# Altium PCB UZ_D_IncrEncd_v2.PcbDoc (part 2 of 2)
Units mm, origin at the board's own origin, x right, y up, seen from the top; angles counter-clockwise.
Board outline 155.99 x 100.01 mm, 2 copper layers (Top Layer, Bottom Layer), stack 0.45 mm thick; 60 components, 97 nets, 455 pads, 49 vias.
Unrouted connection lines stored in the file: 26.
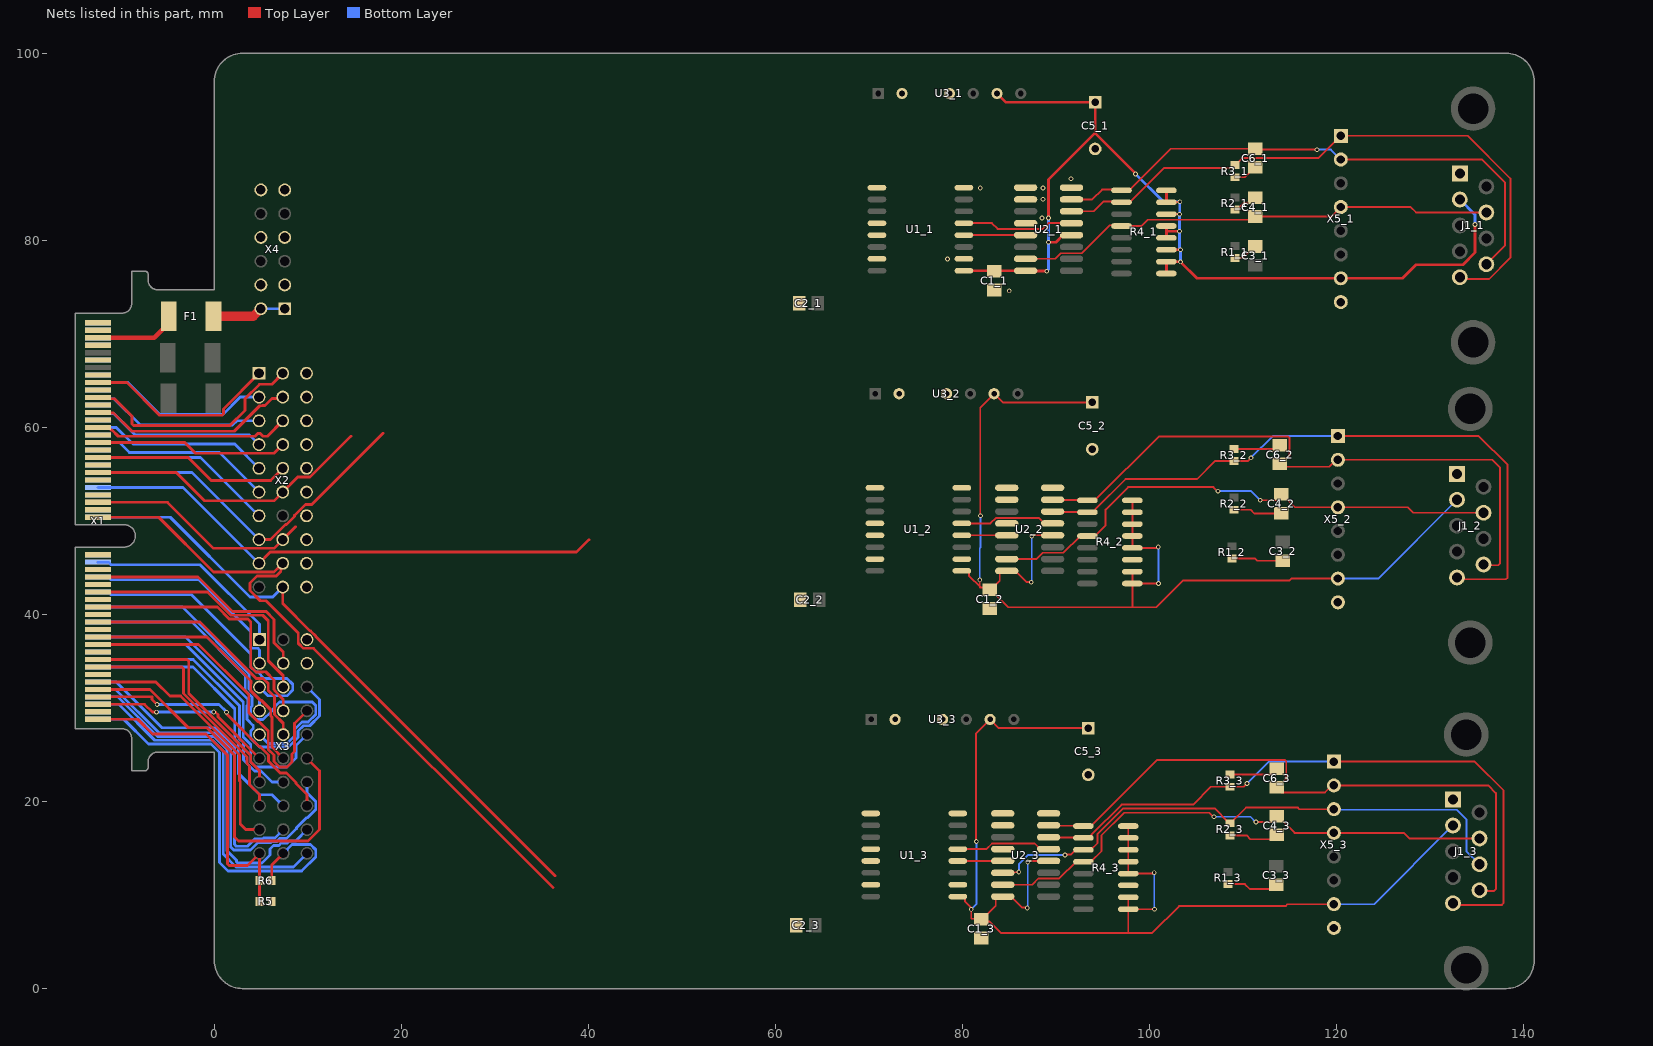
[diagram p2: the nets of this part, all layers, seen from the top]

## Via types
v1: diameter 0.5, hole 0.3, Top Layer to Bottom Layer, 49 vias

## Nets (pads, with @x,y where several pads share a name; then routed paths per layer and width w, separated by ;. In a path a pad name is that pad's centre, name@x,y a point inside that pad or via, vN(x,y) a via of type N, cw(c..) or ccw(c..) an arc to the next point about the centre after c; other vN are vias at no path point) (continued)
B+_3: J1_3.8 R2_3.1 R4_3.3 U2_3.14 X5_3.3 | length 60.8
  Top Layer w0.2: U2_3.14@84.302,12.37 84.364,12.432 85.992,12.432 v1(86.03,12.47) ; v1(90.952,14.275) 90.99,14.313 91.586,14.313 92.107,14.834 R4_3.3@92.926,14.834 93.726,14.834 94.453,15.56 94.453,16.544 97.168,19.26 106.948,19.26 108.402,17.806 108.452,17.806 R2_3.1@108.585,17.673 108.635,17.673 110.312,19.349 115.86,19.349 116.032,19.177 X5_3.3@119.71,19.177
  Bottom Layer w0.2: v1(86.03,12.47) 86.03,13.306 86.999,14.275 v1(90.952,14.275) ; X5_3.3@119.71,19.177 119.776,19.111 132.865,19.111 133.883,18.093 133.883,14.681 J1_3.8@135.283,13.281
B-_1: C4_1.2 J1_1.7 R4_1.4 U2_1.15 X5_1.4 | length 51.9
  Top Layer w0.2: U2_1.15@86.765,78.029 89.916,78.029 90.516,78.629 92.743,78.629 95.731,81.616 R4_1.4@97.039,81.616 ; R4_1.4@97,81.535 99.135,81.535 99.8,82.2 110.95,82.2 111.3,82.55 119.431,82.55 X5_1.4@120.447,83.566 127.915,83.566 128.501,82.98 J1_1.7@136.02,82.98
B-_2: C4_2.2 J1_2.7 R4_2.4 U2_2.15 X5_2.4 | length 56.3
  Top Layer w0.2: U2_2.15@84.734,45.923 87.885,45.923 88.555,46.593 90.782,46.593 92.576,48.387 R4_2.4@93.358,48.387 94.158,48.387 95.295,49.524 95.295,51.212 97.702,53.619 106.829,53.619 107.261,53.188 v1(107.315,53.188) ; v1(111.845,52.215) 113.445,52.215 113.623,52.393 C4_2.2@113.723,52.393 ; C4_2.2@114.071,52.841 114.171,52.841 115.552,51.46 127.61,51.46 128.196,50.874 J1_2.7@135.715,50.874
  Bottom Layer w0.2: v1(107.315,53.188) 110.873,53.188 v1(111.845,52.215)
B-_3: C4_3.2 J1_3.7 R4_3.4 U2_3.15 X5_3.4 | length 56.5
  Top Layer w0.2: U2_3.15@84.302,11.1 87.454,11.1 88.124,11.77 90.351,11.77 92.144,13.564 R4_3.4@92.926,13.564 93.726,13.564 94.863,14.701 94.863,16.389 97.27,18.796 106.397,18.796 106.829,18.364 v1(106.883,18.364) ; v1(111.388,17.798) 112.988,17.798 113.166,17.976 C4_3.2@113.266,17.976 ; C4_3.2@113.216,17.976 114.163,17.976 115.501,16.637 127.178,16.637 127.764,16.051 J1_3.7@135.283,16.051
  Bottom Layer w0.2: v1(106.883,18.364) 110.795,18.364 111.361,17.798 v1(111.388,17.798)
B_encoder_1: U1_1.13 X1.42 X2.22 | length 38.2
  Top Layer w0.3: X2.22@4.775,48.006 5.993,48.006 7.598,49.611 7.702,49.611 8.585,50.494 8.585,50.598 9.738,51.751 10.408,51.751 18.034,59.377
  Bottom Layer w0.3: X1.42@-12.44,55.191 -2.41,55.191 X2.22@4.775,48.006
B_encoder_2: U1_2.13 X1.49 X2.23 | length 24.1
  Top Layer w0.3: X1.49@-12.44,51.991 -5.01,51.991 -0.09,47.071 6.38,47.071 X2.23@7.315,48.006 8.687,49.378
B_encoder_3: U1_3.13 X1.54 X2.29 | length 66.7
  Top Layer w0.3: X2.29@7.315,42.926 7.315,41.173 10.241,38.248 10.293,38.248 10.841,37.7 10.841,37.648 36.424,12.065
  Bottom Layer w0.3: X1.54@-12.44,50.391 -4.722,50.391 3.81,41.859 6.248,41.859 X2.29@7.315,42.926
B_single_1: U1_1.4 U2_1.13 | length 6.5
  Top Layer w0.2: U1_1.4@80.239,80.569 U2_1.13@86.765,80.569
B_single_2: U1_2.4 U2_2.13 | length 4.8
  Top Layer w0.2: U1_2.4@79.934,48.463 U2_2.13@84.734,48.463
B_single_3: U1_3.4 U2_3.13 | length 4.8
  Top Layer w0.2: U1_3.4@79.502,13.64 U2_3.13@84.302,13.64
Collective_FLT: X1.96 | length 36.6
  Bottom Layer w0.3: X1.96@-12.44,30.391 -10.208,30.391 -6.373,26.556 -0.211,26.556 0.946,25.398 0.946,14.386 2.324,13.009 8.462,13.009 9.906,14.453
CPLD_DigIn_01: X1.83 | length 25.8
  Top Layer w0.3: X1.83@-12.44,35.191 -2.919,35.191 -2.743,35.015 -2.743,31.54 3.891,24.906 3.891,24.225 4.826,23.29 4.826,22.073
CPLD_DigIn_02: X1.85 | length 27.3
  Top Layer w0.3: X1.85@-12.44,34.391 -3.478,34.391 -3.302,34.215 -3.302,31.533 3.491,24.74 3.491,24.06 3.772,23.779 3.772,21.784 4.826,20.73 4.826,19.533
CPLD_DigOut_01: X1.84 | length 28.4
  Bottom Layer w0.3: X1.84@-12.44,35.191 -2.265,35.191 2.691,30.235 2.691,26.716 3.108,26.299 3.108,24.443 4.302,23.248 4.973,23.248 6.148,22.073 7.366,22.073
CPLD_DigOut_02: X1.86 | length 29.8
  Bottom Layer w0.3: X1.86@-12.44,34.391 -2.285,34.391 2.184,29.921 2.184,26.657 2.559,26.282 2.559,23.017 4.865,20.711 6.187,20.711 7.366,19.533
DIG_IO_00: X1.17 X2.01 | length 20.8
  Top Layer w0.3: X1.17@-12.44,64.791 -9.34,64.791 -5.848,61.299 0.819,61.299 0.965,61.445 0.965,61.976 X2.01@4.775,65.786
DIG_IO_01: X1.18 X2.04 | length 19.4
  Bottom Layer w0.3: X1.18@-12.44,64.791 -9.237,64.791 -5.845,61.399 0.919,61.399 2.766,63.246 X2.04@4.775,63.246
DIG_IO_02: X1.21 X2.02 | length 24.5
  Top Layer w0.3: X1.21@-12.44,63.191 -12.315,63.066 -10.691,63.066 -8.814,61.189 -8.814,60.374 -8.638,60.198 1.651,60.198 3.277,61.824 3.277,63.07 4.814,64.607 6.136,64.607 X2.02@7.315,65.786
DIG_IO_03: X1.22 X2.07 | length 18.6
  Bottom Layer w0.3: X1.22@-12.44,63.191 -12.315,63.066 -10.717,63.066 -7.899,60.249 1.93,60.249 2.388,60.706 X2.07@4.775,60.706
DIG_IO_04: X1.25 X2.05 | length 22.1
  Top Layer w0.3: X1.25@-12.44,61.591 -12.396,61.547 -10.773,61.547 -8.814,59.588 2.134,59.588 4.856,62.311 5.162,62.311 5.183,62.332 5.41,62.332 6.18,63.102 7.171,63.102 X2.05@7.315,63.246
DIG_IO_05: X1.26 X2.10 | length 18.6
  Bottom Layer w0.3: X1.26@-12.44,61.591 -12.315,61.466 -10.742,61.466 -8.458,59.182 3.759,59.182 X2.10@4.775,58.166
DIG_IO_06: X1.29 X2.08 | length 21.1
  Top Layer w0.3: X1.29@-12.44,59.991 -11.315,59.991 -11.04,59.716 -10.936,59.716 -10.275,59.055 4.342,59.055 4.647,59.36 4.904,59.36 5.208,59.055 5.664,59.055 X2.08@7.315,60.706
DIG_IO_07: X1.30 X2.13 | length 19
  Bottom Layer w0.3: X1.30@-12.44,59.991 -10.486,59.991 -8.712,58.217 2.184,58.217 X2.13@4.775,55.626
DIG_IO_08: X1.33 X2.11 | length 20.6
  Top Layer w0.3: X1.33@-12.44,58.391 -3.163,58.391 -2.003,57.231 6.38,57.231 X2.11@7.315,58.166
DIG_IO_09: X1.34 X2.16 | length 19.4
  Bottom Layer w0.3: X1.34@-12.44,58.391 -10.156,58.391 -9.093,57.328 0.533,57.328 X2.16@4.775,53.086
DIG_IO_10: X1.37 X2.14 | length 21.3
  Top Layer w0.3: X1.37@-12.44,56.791 -2.791,56.791 -0.33,54.331 6.02,54.331 X2.14@7.315,55.626
DIG_IO_11: X1.38 X2.19 | length 19.8
  Bottom Layer w0.3: X1.38@-12.44,56.791 -1.47,56.791 X2.19@4.775,50.546
DIG_IO_12: U1_1.12 X1.41 X2.17 | length 31.2
  Top Layer w0.3: X1.41@-12.44,55.191 -4.07,55.191 -1.03,52.151 6.38,52.151 X2.17@7.315,53.086 8.92,54.691 10.242,54.691 14.614,59.063
DIG_IO_15: U1_2.12 X1.46 X2.25 | length 56.9
  Top Layer w0.3: X2.25@4.775,45.466 5.98,46.671 38.736,46.671 40.062,47.997
  Bottom Layer w0.3: X1.46@-12.44,53.591 -3.35,53.591 X2.25@4.775,45.466
DIG_IO_18: U1_3.12 X1.53 X2.26 | length 74
  Top Layer w0.3: X1.53@-12.44,50.391 -5.944,50.391 -0.084,44.531 6.38,44.531 X2.26@7.11,45.261 ; X2.26@7.315,45.466 X2.26@7.11,45.261 ; 36.195,10.795 10.612,36.378 9.519,36.378 8.971,36.925 8.971,38.019 5.518,41.472 4.907,41.472 3.81,42.569 3.81,43.358 4.572,44.12 6.621,44.12 7.106,44.604 7.106,44.755 7.11,44.76 X2.26@7.11,45.261
DIG_IO_21: X1.58 X3.01 | length 21.7
  Bottom Layer w0.3: X1.58@-12.44,45.591 -11.315,45.591 -11.04,45.316 -1.526,45.316 4.826,38.964 X3.01@4.826,37.313
DIG_IO_22: X1.61 X3.05 | length 25.8
  Top Layer w0.3: X1.61@-12.44,43.991 -1.751,43.991 1.93,40.31 5.549,40.31 6.388,39.471 6.388,36.968 7.366,35.99 X3.05@7.366,34.773
DIG_IO_23: X1.62 X3.04 | length 22.9
  Bottom Layer w0.3: X1.62@-12.44,43.991 -11.315,43.991 -11.04,43.716 -1.628,43.716 3.891,38.197 3.891,36.524 4.037,36.378 4.65,36.378 4.826,36.202 X3.04@4.826,34.773
DIG_IO_24: X1.65 X3.08 | length 27.2
  Top Layer w0.3: X1.65@-12.44,42.391 -0.716,42.391 1.765,39.91 5.175,39.91 5.761,39.324 5.761,35.055 7.366,33.45 X3.08@7.366,32.233
DIG_IO_25: X1.66 X3.07 | length 30.5
  Bottom Layer w0.3: X1.66@-12.44,42.391 -11.315,42.391 -11.04,42.116 -2.467,42.116 3.891,35.758 3.891,34.385 4.439,33.838 4.65,33.838 5.32,33.168 7.753,33.168 8.382,32.539 8.382,31.926 7.753,31.298 5.761,31.298 X3.07@4.826,32.233
DIG_IO_26: X1.69 X3.11 | length 28.6
  Top Layer w0.3: X1.69@-12.44,40.791 0.318,40.791 1.599,39.51 3.594,39.51 3.891,39.213 3.891,34.385 4.439,33.838 5.213,33.838 5.249,33.873 5.497,33.873 6.375,32.995 6.375,31.979 6.477,31.877 6.477,31.799 7.366,30.91 X3.11@7.366,29.693
DIG_IO_27: X1.70 X3.10 | length 23.5
  Bottom Layer w0.3: X1.70@-12.44,40.791 -3.421,40.791 3.706,33.664 3.706,32.03 4.826,30.91 X3.10@4.826,29.693
DIG_IO_28: X1.73 X3.14 | length 27.1
  Top Layer w0.3: X1.73@-12.44,39.191 -1.548,39.191 4.475,33.168 5.213,33.168 5.761,32.62 5.761,31.882 6.431,31.212 6.431,29.305 7.366,28.37 X3.14@7.366,27.153
DIG_IO_29: X1.74 X3.13 | length 39.8
  Bottom Layer w0.3: X1.74@-12.44,39.191 -2.386,39.191 3.306,33.499 3.306,31.865 4.013,31.157 4.013,30.202 3.891,30.08 3.891,29.305 4.439,28.758 5.213,28.758 6.096,29.64 6.096,29.745 6.984,30.632 10.465,30.632 10.841,30.256 10.841,29.305 10.032,28.497 9.362,28.497 8.553,27.688 8.553,27.017 7.753,26.218 5.761,26.218 X3.13@4.826,27.153
DIG_Res_00: X1.78 | length 36.5
  Bottom Layer w0.3: X1.78@-12.44,37.591 -3.086,37.591 3.585,30.92 3.585,30.34 3.491,30.246 3.491,28.798 4.15,28.14 4.15,27.798 3.891,27.54 3.891,26.765 4.839,25.818 7.919,25.818 8.953,26.852 8.953,27.522 9.528,28.097 10.198,28.097 11.241,29.14 11.241,30.898 9.906,32.233
DIG_Res_01: X1.79 | length 35.2
  Top Layer w0.3: X1.79@-12.44,36.791 -1.693,36.791 3.677,31.421 3.677,29.52 4.667,28.53 4.771,28.53 5.761,27.54 5.761,25.566 6.37,24.957 6.37,24.286 6.979,23.678 7.753,23.678 8.301,24.225 8.301,25.071 8.571,25.341 8.571,28.358 9.906,29.693
DIG_Res_02: X1.80 | length 33.3
  Bottom Layer w0.3: X1.80@-12.44,36.791 -3.052,36.791 3.091,30.648 3.091,26.881 3.891,26.081 3.891,24.225 4.439,23.678 7.753,23.678 8.727,24.652 8.727,25.974 9.906,27.153
DIG_Res_03: X1.91 | length 44.2
  Top Layer w0.3: X1.91@-12.44,31.991 -6.889,31.991 -2.787,27.889 -0.79,27.889 2.159,24.941 2.159,16.21 2.581,15.788 10.023,15.788 11.241,17.005 11.241,23.278 9.906,24.613
DIG_Res_04: X1.92 | length 41.8
  Bottom Layer w0.3: X1.92@-12.44,31.991 -10.556,31.991 -5.921,27.356 0.12,27.356 1.759,25.717 1.759,15.13 2.074,14.815 3.866,14.815 4.652,15.601 6.061,15.601 6.163,15.704 6.643,15.704 6.966,16.027 7.723,16.027 8.788,17.093 8.788,17.197 9.854,18.263 9.958,18.263 10.841,19.145 10.841,19.997 9.906,20.932 9.906,22.073
DIG_Res_05: X1.93 | length 28.6
  Top Layer w0.3: X1.93@-12.44,31.191 -6.655,31.191 -6.655,30.912 v1(-6.121,30.378) ; v1(1.295,29.54) 1.334,29.502 1.334,29.323 4.79,25.866 4.895,25.866 5.794,24.967 5.794,24.297 7.044,23.047 7.714,23.047 8.727,22.034 8.727,21.929 9.906,20.75 9.906,19.533
  Bottom Layer w0.3: v1(-6.121,30.378) 0.508,30.378 1.295,29.591 v1(1.295,29.54)
DIG_Res_06: X1.94 | length 38
  Bottom Layer w0.3: X1.94@-12.44,31.191 -10.321,31.191 -6.086,26.956 -0.046,26.956 1.346,25.564 1.346,14.732 2.362,13.716 2.362,13.536 2.489,13.409 5.105,13.409 5.959,14.263 5.959,14.933 6.329,15.304 6.895,15.304 7.137,15.546 7.807,15.546 8.049,15.788 8.701,15.788 9.906,16.993
DIG_Res_07: X1.95 | length 19.8
  Top Layer w0.3: X1.95@-12.44,30.391 -7.455,30.391 -6.619,29.555 v1(-6.192,29.555) ; v1(-0.064,29.574) -0.026,29.535 0.136,29.535 0.373,29.298 0.373,29.065 4.826,24.613
  Bottom Layer w0.3: v1(-6.192,29.555) -6.174,29.574 v1(-0.064,29.574)
DIG_Res_08: X1.77 | length 28.1
  Top Layer w0.3: X1.77@-12.44,37.591 -0.786,37.591 3.914,32.891 3.914,32.642 3.891,32.62 3.891,31.845 4.909,30.828 5.013,30.828 6.031,29.81 6.031,29.14 6.161,29.01 6.161,25.818 7.366,24.613
GND: C2_1.1 C2_2.1 C2_3.1 R5.1 U1_1.9 U1_1.15 U1_2.9 U1_2.15 U1_3.9 U1_3.15 U3_1.2 U3_2.2 U3_3.2 X1.1 X1.2 X1.3 X1.4 X1.7 X1.8 X1.11 X1.12 X1.15 X1.16 X1.19 X1.20 X1.23 X1.24 X1.27 X1.28 X1.31 X1.32 X1.35 X1.36 X1.39 X1.40 X1.43 X1.44 X1.47 X1.48 X1.51 X1.52 X1.55 X1.56 X1.59 X1.60 X1.63 X1.64 X1.67 X1.68 X1.71 X1.72 X1.75 X1.76 X1.81 X1.82 X1.87 X1.88 X1.97 X1.98 X2.03 X2.06 X2.09 X2.12 X2.15 X2.18 X2.21 X2.24 X2.27 X2.30 X3.03 X3.06 X4.03 X4.04 X4.07 X4.08 X4.11 X4.12
GND_ENC_1: C1_1.1 C5_1.2 J1_1.1 U1_1.2 U1_1.8 U2_1.8 U2_1.9 U2_1.10 U2_1.12 U3_1.4 X5_1.8
  other v1: 85,74.6 78.4,78 88.5,82.4 88.6,84.4 81.9,85.6 88.6,85.6 91.6,86.6
GND_ENC_2: C1_2.1 C5_2.2 J1_2.1 U1_2.2 U1_2.8 U2_2.8 U2_2.9 U2_2.10 U2_2.12 U3_2.4 X5_2.8
GND_ENC_3: C1_3.1 C5_3.2 J1_3.1 U1_3.2 U1_3.8 U2_3.8 U2_3.9 U2_3.10 U2_3.12 U3_3.4 X5_3.8
I2C0_SCA: X1.90 | length 34
  Bottom Layer w0.3: X1.90@-12.44,32.791 -10.49,32.791 -5.588,27.889 0.152,27.889 2.159,25.883 2.159,15.392 2.337,15.215 3.531,15.215 4.317,16.001 5.157,16.001 5.259,16.104 6.477,16.104 7.366,16.993
I2C0_SCL: X1.89 | length 28.1
  Top Layer w0.3: X1.89@-12.44,32.791 -6.273,32.791 -4.75,31.267 -3.602,31.267 2.691,24.974 2.691,22.201 2.762,22.13 2.762,17.583 3.353,16.993 4.826,16.993
NetC3_1_1: C3_1.1 R1_1.2 | length 2.7
  Top Layer w0.2: R1_1.2@109.118,78.099 109.98,78.099 111.228,79.348 C3_1.1@111.328,79.348
NetC3_2_1: C3_2.1 R1_2.2 | length 5.6
  Top Layer w0.2: R1_2.2@108.814,45.994 111.262,45.994 111.514,45.742 C3_2.1@114.262,45.742
NetC3_3_1: C3_3.1 R1_3.2 | length 4.9
  Top Layer w0.2: R1_3.2@108.382,11.171 110.193,11.171 110.72,10.643 C3_3.1@113.106,10.643
NetC4_1_1: C4_1.1 R2_1.2 | length 2.2
  Top Layer w0.2: R2_1.2@109.322,83.301 109.372,83.301 110.095,84.025 110.482,84.025 C4_1.1@111.007,84.55
NetC4_2_1: C4_2.1 R2_2.2 | length 5.3
  Top Layer w0.2: R2_2.2@109.017,51.196 110.808,51.196 111.223,50.781 114.011,50.781 C4_2.1@114.071,50.841
NetC4_3_1: C4_3.1 R2_3.2 | length 5.4
  Top Layer w0.2: R2_3.2@108.585,16.373 110.376,16.373 110.791,15.958 113.148,15.958 C4_3.1@113.614,16.424
NetC6_1_1: C6_1.1 R3_1.2 | length 2.6
  Top Layer w0.2: R3_1.2@109.118,86.75 110.178,86.75 111.228,87.8 C6_1.1@111.328,87.8
NetC6_2_1: C6_2.1 R3_2.2 | length 5.1
  Top Layer w0.2: R3_2.2@109.017,57.698 113.544,57.698 C6_2.1@113.944,58.099
NetC6_3_1: C6_3.1 R3_3.2 | length 5.3
  Top Layer w0.2: R3_3.2@108.585,22.875 112.86,22.875 113.489,23.504 C6_3.1@113.589,23.504
PILOT_IN: R6.2 X1.100 | length 45.8
  Top Layer w0.3: R6.2@6.136,11.532 6.136,13.223 7.366,14.453
  Bottom Layer w0.3: X1.100@-12.44,28.791 -9.691,28.791 -7.036,26.137 -0.358,26.137 0.546,25.233 0.546,13.47 1.456,12.56 9.336,12.56 10.841,14.065 10.841,14.84 10.293,15.388 8.301,15.388 7.366,14.453
PILOT_OUT: R5.2 R6.1 X1.99 | length 36.2
  Top Layer w0.3: X1.99@-12.44,28.791 -8.192,28.791 -6.629,27.229 -0.884,27.229 1.397,24.948 1.397,13.333 1.573,13.157 3.531,13.157 4.826,14.453 4.831,14.447 4.831,11.537 R6.1@4.836,11.532 R5.2@4.836,9.322
VCC_ENC_1: C1_1.2 C5_1.1 J1_1.2 R4_1.9 R4_1.10 R4_1.11 R4_1.12 R4_1.13 R4_1.14 R4_1.15 R4_1.16 U1_1.1 U2_1.4 U2_1.16 U3_1.6 X5_1.7 | length 112.2
  Top Layer w0.2: R4_1.14@101.803,82.802 103.198,82.802 v1(103.2,82.8) ; R4_1.15@101.825,84.1 103.219,84.1 v1(103.245,84.126) ; v1@103.297,78.997 v1(103.3,79)
  Top Layer w0.3: U1_1.1@80.15,76.755 U2_1.16@86.75,76.755 86.786,76.719 88.981,76.719 v1(89,76.7) ; U3_1.6@83.685,95.708 84.615,94.778 C5_1.1@94.183,94.778 94.183,91.483 ; v1(89.2,79.8) 89.985,79.8 90.75,80.565 U2_1.4@91.65,80.565 ; v1(89.2,82.4) 89.2,86.5 94.183,91.483 ; v1(98.5,87.1) 98.5,87.166 94.183,91.483 ; R4_1.9@101.8,76.455 R4_1.10@101.8,77.725 101.813,77.712 103.288,77.712 v1(103.3,77.7) 105.054,75.946 X5_1.7@120.447,75.946 127.046,75.946 128.5,77.4 133.5,77.4 134.798,78.698 v1(134.798,81.703) ; R4_1.11@101.8,78.995 101.803,78.997 v1@103.297,78.997 ; R4_1.12@101.8,80.265 101.8,80.9 ; R4_1.13@101.8,81.535 101.8,80.9 ; R4_1.14@101.8,82.805 R4_1.14@101.803,82.802 ; R4_1.16@101.8,85.345 R4_1.15@101.8,84.075 R4_1.15@101.825,84.1 ; v1(103.2,80.977) 101.877,80.977 101.8,80.9
  Bottom Layer w0.3: v1(89,76.7) 89.2,76.9 v1(89.2,79.8) v1(89.2,82.4) ; v1(98.5,87.1) 101.474,84.126 v1(103.245,84.126) 103.222,84.103 103.222,82.822 v1(103.2,82.8) v1(103.2,80.977) 103.2,79.154 103.3,79.054 v1(103.3,79) v1(103.3,77.7) ; J1_1.2@133.18,84.365 134.798,82.747 v1(134.798,81.703)
VCC_ENC_2: C1_2.2 C5_2.1 J1_2.2 R4_2.9 R4_2.10 R4_2.11 R4_2.12 R4_2.13 R4_2.14 R4_2.15 R4_2.16 U1_2.1 U2_2.4 U2_2.16 U3_2.6 X5_2.7 | length 123.7
  Top Layer w0.2: U1_2.1@79.934,44.653 80.553,44.653 80.691,44.515 80.691,44.135 81.94,42.886 82.65,42.886 C1_2.2@82.906,42.631 C1_2.2@83.006,42.631 ; 81.848,42.886 v1(81.848,43.697) ; v1(81.915,50.546) 81.89,50.571 81.89,62.111 U3_2.6@83.38,63.602 84.31,62.673 C5_2.1@93.878,62.673 ; v1(87.351,43.434) 87.312,43.472 86.815,43.472 85.634,44.653 U2_2.16@84.734,44.653 84.169,44.653 83.984,44.468 83.984,43.609 C1_2.2@83.006,42.631 ; v1(87.401,48.362) 87.503,48.463 U2_2.4@89.634,48.463 ; R4_2.10@98.158,44.577 R4_2.9@98.158,43.307 ; R4_2.16@98.158,52.197 R4_2.15@98.158,50.927 R4_2.14@98.158,49.657 R4_2.13@98.158,48.387 R4_2.12@98.158,47.117 100.787,47.117 100.889,47.219 v1(100.94,47.219) ; v1(100.965,43.307) R4_2.9@98.158,43.307 ; X5_2.7@120.142,43.84 115.173,43.84 114.976,43.644 103.588,43.644 100.711,40.767 98.196,40.767 ; C1_2.2@83.006,42.631 84.869,40.767 98.196,40.767 ; R4_2.9@98.158,43.307 98.158,40.805 98.196,40.767
  Bottom Layer w0.2: v1(81.848,43.697) 81.848,47.069 81.915,47.136 v1(81.915,50.546) ; v1(87.351,43.434) 87.351,43.51 87.401,43.561 v1(87.401,48.362) ; v1(100.94,47.219) 100.94,43.332 v1(100.965,43.307) ; X5_2.7@120.142,43.84 124.456,43.84 J1_2.2@132.875,52.259
VCC_ENC_3: C1_3.2 C5_3.1 J1_3.2 R4_3.9 R4_3.10 R4_3.11 R4_3.12 R4_3.13 R4_3.14 R4_3.15 R4_3.16 U1_3.1 U2_3.4 U2_3.16 U3_3.6 X5_3.7 | length 126
  Top Layer w0.2: U1_3.1@79.502,9.83 80.121,9.83 80.259,9.691 80.259,9.312 v1@81.019,8.553 ; v1(80.933,8.467) 80.933,8.08 80.933,7.462 81.542,7.462 C1_3.2@81.823,7.181 ; v1(81.483,15.723) 81.458,15.748 81.458,27.288 U3_3.6@82.949,28.779 83.878,27.849 C5_3.1@93.447,27.849 ; v1(86.919,8.611) 86.881,8.649 86.383,8.649 U2_3.16@85.202,9.83 ; v1(86.97,13.538) 87.071,13.64 U2_3.4@89.202,13.64 ; R4_3.10@97.726,9.754 R4_3.9@97.726,8.484 ; R4_3.16@97.726,17.374 R4_3.15@97.726,16.104 R4_3.14@97.726,14.834 R4_3.13@97.726,13.564 R4_3.12@97.726,12.294 100.355,12.294 100.457,12.395 v1(100.508,12.395) ; v1(100.533,8.484) R4_3.9@97.726,8.484 ; X5_3.7@119.71,9.017 114.741,9.017 114.544,8.82 103.156,8.82 100.279,5.944 97.765,5.944 ; C1_3.2@81.823,7.181 82.87,7.181 84.107,5.944 97.765,5.944 ; C1_3.2@81.823,7.181 81.823,7.233 C1_3.2@81.991,7.401 82.091,7.401 83.552,8.862 83.552,9.645 83.737,9.83 U2_3.16@84.302,9.83 ; U2_3.16@84.302,9.83 U2_3.16@85.202,9.83 ; U2_3.16@84.302,9.83 U2_3.16@85.202,9.83 ; R4_3.9@97.726,8.484 97.726,5.982 97.765,5.944
  Bottom Layer w0.2: v1(80.933,8.467) 81.483,9.017 v1(81.483,15.723) ; v1(86.919,8.611) 86.919,8.687 86.97,8.738 v1(86.97,13.538) ; v1(100.508,12.395) 100.508,8.509 v1(100.533,8.484) ; X5_3.7@119.71,9.017 124.024,9.017 J1_3.2@132.443,17.436
VIN: F1.1 X1.5 X1.6 | length 8.9
  Top Layer w0.5: X1.5@-12.44,69.591 -6.44,69.591 -4.879,71.152 F1.1@-4.879,71.882
VIN_fused: F1.2 X4.01 X4.02 | length 8
  Top Layer w1: F1.2@-0.099,71.882 4.166,71.882 X4.02@4.978,72.695
  Bottom Layer w0.3: X4.02@4.978,72.695 X4.01@7.518,72.695
Z+_1: J1_1.5 R3_1.1 R4_1.2 U2_1.6 X5_1.1 | length 67.1
  Top Layer w0.2: U2_1.6@91.665,83.109 94.009,83.109 95.052,84.152 R4_1.2@97.034,84.152 ; R4_1.2@97,84.075 97.875,84.075 101.525,87.725 108.793,87.725 R3_1.1@109.118,88.05 109.168,88.05 109.918,88.8 118.061,88.8 X5_1.1@120.447,91.186 134.014,91.186 138.582,86.618 138.582,78.153 136.299,75.87 133.365,75.87 J1_1.5@133.18,76.055
Z+_2: J1_2.5 R3_2.1 R4_2.2 U2_2.6 X5_2.1 | length 71.1
  Top Layer w0.2: U2_2.6@89.634,51.003 89.672,50.965 93.32,50.965 R4_2.2@93.358,50.927 94.077,50.927 94.215,51.066 94.215,51.264 97.434,54.483 105.08,54.483 106.995,56.398 R3_2.1@109.017,56.398 110.5,56.398 v1(110.846,56.744) ; X5_2.1@120.142,59.08 135.204,59.08 138.278,56.007 138.278,43.94 138.102,43.764 133.06,43.764 J1_2.5@132.875,43.949
  Bottom Layer w0.2: v1(110.846,56.744) 113.182,59.08 X5_2.1@120.142,59.08
Z+_3: J1_3.5 R3_3.1 R4_3.2 U2_3.6 X5_3.1 | length 71.1
  Top Layer w0.2: U2_3.6@89.202,16.18 89.24,16.142 92.888,16.142 R4_3.2@92.926,16.104 93.645,16.104 93.784,16.242 93.784,16.441 97.003,19.66 104.648,19.66 106.563,21.575 R3_3.1@108.585,21.575 110.069,21.575 v1(110.414,21.92) ; X5_3.1@119.71,24.257 134.772,24.257 137.846,21.184 137.846,9.117 137.67,8.941 132.629,8.941 J1_3.5@132.443,9.126
  Bottom Layer w0.2: v1(110.414,21.92) 112.751,24.257 X5_3.1@119.71,24.257
Z-_1: C6_1.2 J1_1.9 R4_1.1 U2_1.7 X5_1.2 | length 59.7
  Top Layer w0.2: U2_1.7@91.665,84.379 93.879,84.379 94.926,85.426 97.881,85.426 102.255,89.8 C6_1.2@111.328,89.8 111.428,89.7 v1(117.9,89.7) ; X5_1.2@120.447,88.646 135.554,88.646 138,86.2 138,79.42 J1_1.9@136.02,77.44
  Bottom Layer w0.2: v1(117.9,89.7) 119.393,89.7 X5_1.2@120.447,88.646
Z-_2: C6_2.2 J1_2.9 R4_2.1 U2_2.7 X5_2.2 | length 68
  Top Layer w0.2: U2_2.7@89.634,52.273 89.672,52.235 93.32,52.235 R4_2.1@93.358,52.197 94.158,52.197 100.985,59.024 114.823,59.024 114.969,58.878 114.969,57.024 114.044,56.099 C6_2.2@113.944,56.099 114.249,55.794 119.191,55.794 119.937,56.54 X5_2.2@120.142,56.54 136.652,56.54 137.465,55.728 137.465,45.439 137.289,45.263 135.787,45.263 J1_2.9@135.715,45.334
Z-_3: C6_3.2 J1_3.9 R4_3.1 U2_3.7 X5_3.2 | length 68.1
  Top Layer w0.2: U2_3.7@89.202,17.45 89.24,17.412 92.888,17.412 R4_3.1@92.926,17.374 93.726,17.374 100.782,24.429 114.467,24.429 114.614,24.283 114.614,22.429 113.689,21.504 C6_3.2@113.589,21.504 114.114,20.979 116.482,20.979 116.491,20.971 118.759,20.971 119.505,21.717 X5_3.2@119.71,21.717 136.22,21.717 137.033,20.904 137.033,10.615 136.857,10.44 135.355,10.44 J1_3.9@135.283,10.511
Z_single_1: U1_1.5 U2_1.5 | length 11.9
  Top Layer w0.2: U1_1.5@80.239,81.839 83.135,81.839 83.75,81.223 88.584,81.223 89.2,81.839 U2_1.5@91.665,81.839
Z_single_2: U1_2.5 U2_2.5 | length 10.2
  Top Layer w0.2: U1_2.5@79.934,49.733 82.985,49.733 83.585,50.333 88.134,50.333 88.734,49.733 U2_2.5@89.634,49.733
Z_single_3: U1_3.5 U2_3.5 | length 10.2
  Top Layer w0.2: U1_3.5@79.502,14.91 82.554,14.91 83.154,15.51 87.702,15.51 88.302,14.91 U2_3.5@89.202,14.91
pads on no net: J1_1.6 J1_1.10 J1_1.11 J1_2.6 J1_2.10 J1_2.11 J1_3.6 J1_3.10 J1_3.11 R4_1.7 R4_1.8 R4_2.7 R4_2.8 R4_3.7 R4_3.8 U1_1.6 U1_1.7 U1_1.11 U1_2.6 U1_2.7 U1_2.11 U1_3.6 U1_3.7 U1_3.11 U2_1.11 U2_2.11 U2_3.11 U3_1.5 U3_1.7 U3_2.5 U3_2.7 U3_3.5 U3_3.7 X3.09 X3.12 X3.15 X3.16 X3.17 X3.18 X3.19 X3.20 X3.21 X3.22 X3.23 X3.24 X3.25 X3.26 X3.27 X3.28 X3.29 X3.30

## Polygon pours and split planes (outlines as drawn)
GND_ENC_1 on Top Layer "GND_ENC_1_BOTTOM" (solid, remove dead copper, pour order 8): 75.6,96.925 75.6,67.222 139.2,67.222 139.2,96.863
GND_ENC_3 on Top Layer "GND_ENC_3_TOP" (solid, remove dead copper, pour order 4): 76.352,32.385 76.352,0.534 139.319,0.534 139.319,32.385
GND_ENC_2 on Top Layer "GND_ENC_2_TOP" (solid, remove dead copper, pour order 3): 76.937,64.972 76.937,34.214 139.522,34.214 139.522,64.972
GND on Top Layer "NONET_L01_P000" (solid, remove dead copper, shelved, pour order 0): 3,100 75.54,100 75.59,100.051 75.59,0.127 2.286,0.127 0,2.413 0,25.275 -6.526,25.275 -7.073,24.728 -7.073,23.679 -7.06,23.666 -7.46,23.266 -8.831,23.266 -8.853,23.288 -8.853,27.168 -9.451,27.766 -14.831,27.766 -14.84,27.775 -14.84,47.191 -9.095,47.191 -8.407,47.879 -8.407,48.827 -9.181,49.6 -11.841,49.6 -11.85,49.591 -11.859,49.6 -14.84,49.6 -14.84,72.225 -14.827,72.238 -9.861,72.238 -9.849,72.225 -9.411,72.225 -8.84,72.796 -8.84,76.712 -8.777,76.649 -7.238,76.649 -7.238,75.89 -6.635,75.287 -6.635,74.898 -4.946,74.898 -4.773,74.725 -0.02,74.725 -0.02,98.177 1.804,100
GND_ENC_1 on Bottom Layer "GND_ENC_1_BOTTOM" (solid, remove dead copper, pour order 10): 75.6,96.925 75.6,67.222 139.2,67.222 139.2,96.863
GND_ENC_2 on Bottom Layer "GND_ENC_2_BOTTOM" (solid, remove dead copper, pour order 9): 77.267,65.038 77.267,34.279 139.243,34.279 139.243,65.038
GND_ENC_3 on Bottom Layer "GND_ENC_3_BOTTOM" (solid, remove dead copper, pour order 7): 76.479,31.876 76.479,1.245 139.014,1.245 139.014,31.876
GND on Bottom Layer "NONET_L02_P006" (solid, remove dead copper, shelved, pour order 6): 2.822,100.152 74.321,100.152 75.438,100.152 75.413,0.279 2.108,0.279 -0.178,2.565 -0.178,25.427 -6.704,25.427 -7.251,24.88 -7.251,23.831 -7.238,23.818 -7.638,23.418 -9.009,23.418 -9.031,23.44 -9.031,27.321 -9.628,27.918 -15.009,27.918 -15.018,27.927 -15.018,47.343 -9.273,47.343 -8.585,48.031 -8.585,48.979 -9.359,49.752 -12.019,49.752 -12.028,49.743 -12.037,49.752 -15.018,49.752 -15.018,72.377 -15.005,72.39 -10.039,72.39 -10.027,72.377 -9.588,72.377 -9.018,72.948 -9.018,76.864 -8.955,76.801 -7.416,76.801 -7.416,76.043 -6.813,75.439 -6.813,75.05 -5.124,75.05 -4.951,74.877 -0.198,74.877 -0.198,98.329 1.626,100.152

## Silkscreen, mask and mechanical layers (free items; w line width, h text height)
Mechanical 1:
  lines w0.1: 141.141,3 cw(c138.141,3) 138.141,0 3,0 cw(c3,3) 0,3 0,25.275 -6.073,25.275 ccw(c-6.073,24.275) -7.073,24.275 -7.073,23.675 cw(c-7.473,23.675) -7.473,23.275 -8.853,23.275 -8.853,26.775 ccw(c-9.853,26.775) -9.853,27.775 -14.853,27.775 -14.853,47.2 -9.653,47.2 ccw(c-9.653,48.4) -9.653,49.6 -14.853,49.6 -14.853,72.225 -9.853,72.225 ccw(c-9.853,73.225) -8.853,73.225 -8.853,76.725 -7.473,76.725 cw(c-7.473,76.325) -7.073,76.325 -7.073,75.725 ccw(c-6.073,75.725) -6.073,74.725 0,74.725 0,97 cw(c3,97) 3,100 138.141,100.01 cw(c138.141,97.01) 141.141,97.01

## Dimensions
141.141,0 to 141.141,100 on Mechanical 2
146.143,97.802 to -14.84,72.216 on Mechanical 2
141.141,100 to -14.853,72.225 on Mechanical 2
141.141,100 to 0.031,100 on Mechanical 2

## Text inside footprints (layer, text, board x,y; h text height)
J1_1: Top Overlay "6" at 139.125,86.25 h1.5 r270; Top Overlay "9" at 139.125,77.94 h1.5 r270; Top Overlay "5" at 129.725,76.555 h1.5 r270; Top Overlay "1" at 129.725,87.385 h1.5 r270
J1_2: Top Overlay "1" at 129.42,55.279 h1.5 r270; Top Overlay "5" at 129.42,44.449 h1.5 r270; Top Overlay "9" at 138.82,45.834 h1.5 r270; Top Overlay "6" at 138.82,54.144 h1.5 r270
J1_3: Top Overlay "6" at 138.388,19.321 h1.5 r270; Top Overlay "9" at 138.388,11.011 h1.5 r270; Top Overlay "5" at 128.988,9.626 h1.5 r270; Top Overlay "1" at 128.988,20.456 h1.5 r270
U3_1: Top Overlay "1" at 70.735,91.333 h1.5; Top Overlay "7" at 85.725,91.333 h1.5; Top Overlay "4" at 78.105,91.333 h1.5; Top Overlay "2" at 73.025,91.333 h1.5
U3_2: Top Overlay "1" at 70.43,59.227 h1.5; Top Overlay "7" at 85.42,59.227 h1.5; Top Overlay "4" at 77.8,59.227 h1.5; Top Overlay "2" at 72.72,59.227 h1.5
U3_3: Top Overlay "1" at 69.999,24.404 h1.5; Top Overlay "7" at 84.989,24.404 h1.5; Top Overlay "4" at 77.369,24.404 h1.5; Top Overlay "2" at 72.289,24.404 h1.5